# Altium PCB Flashlight.PcbDoc
Units mil, origin at the board's own origin, x right, y up, seen from the top; angles counter-clockwise.
Board outline 2862.27 x 1332.27 mil, 2 copper layers (Top Layer, Bottom Layer); 11 components, 6 nets, 31 pads, 7 vias.
Unrouted connection lines stored in the file: 1.
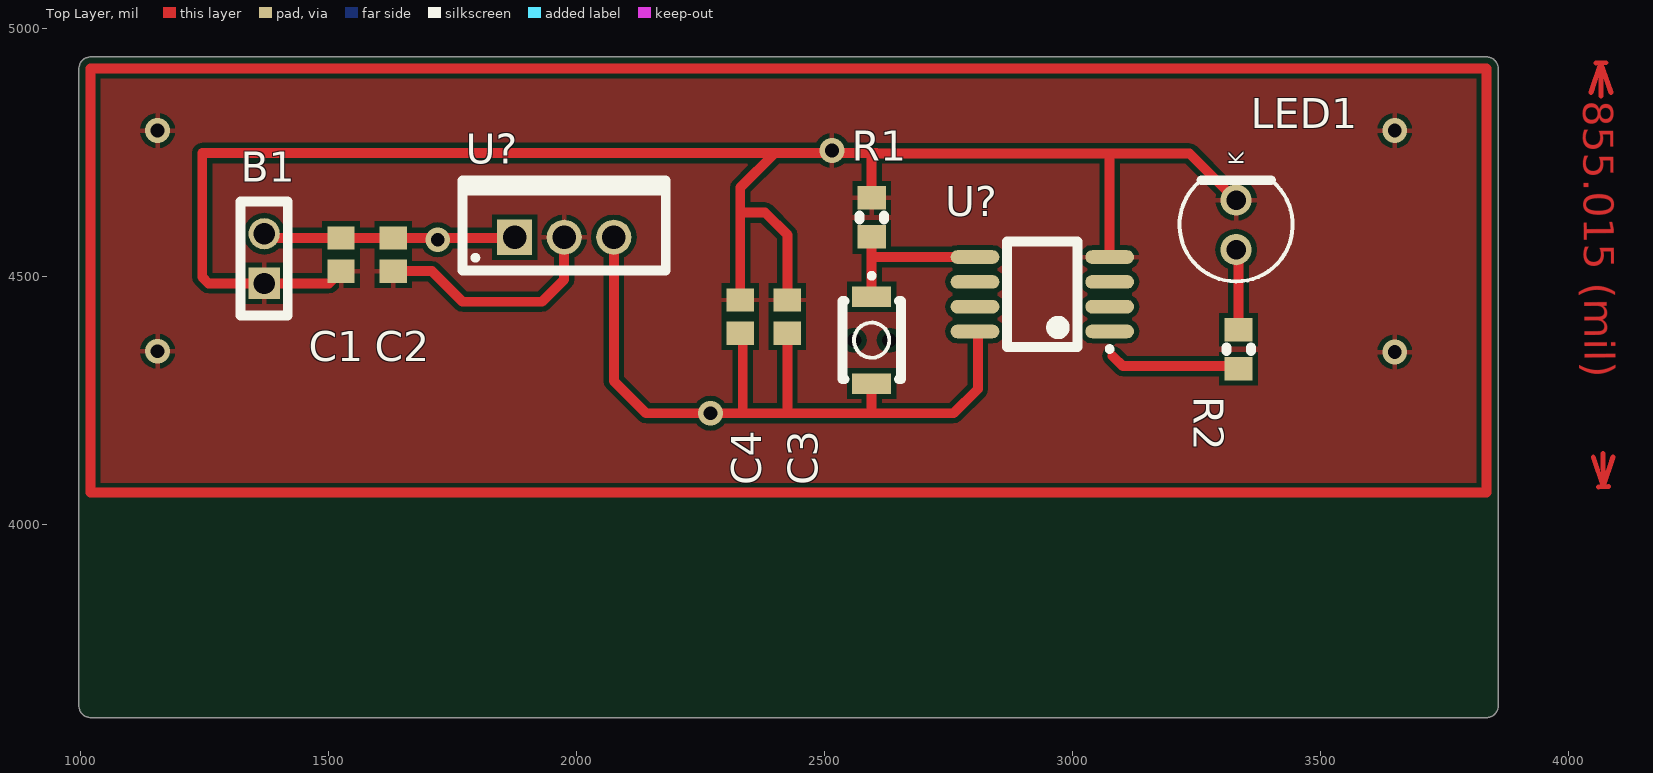
[diagram p0: Top Layer view]
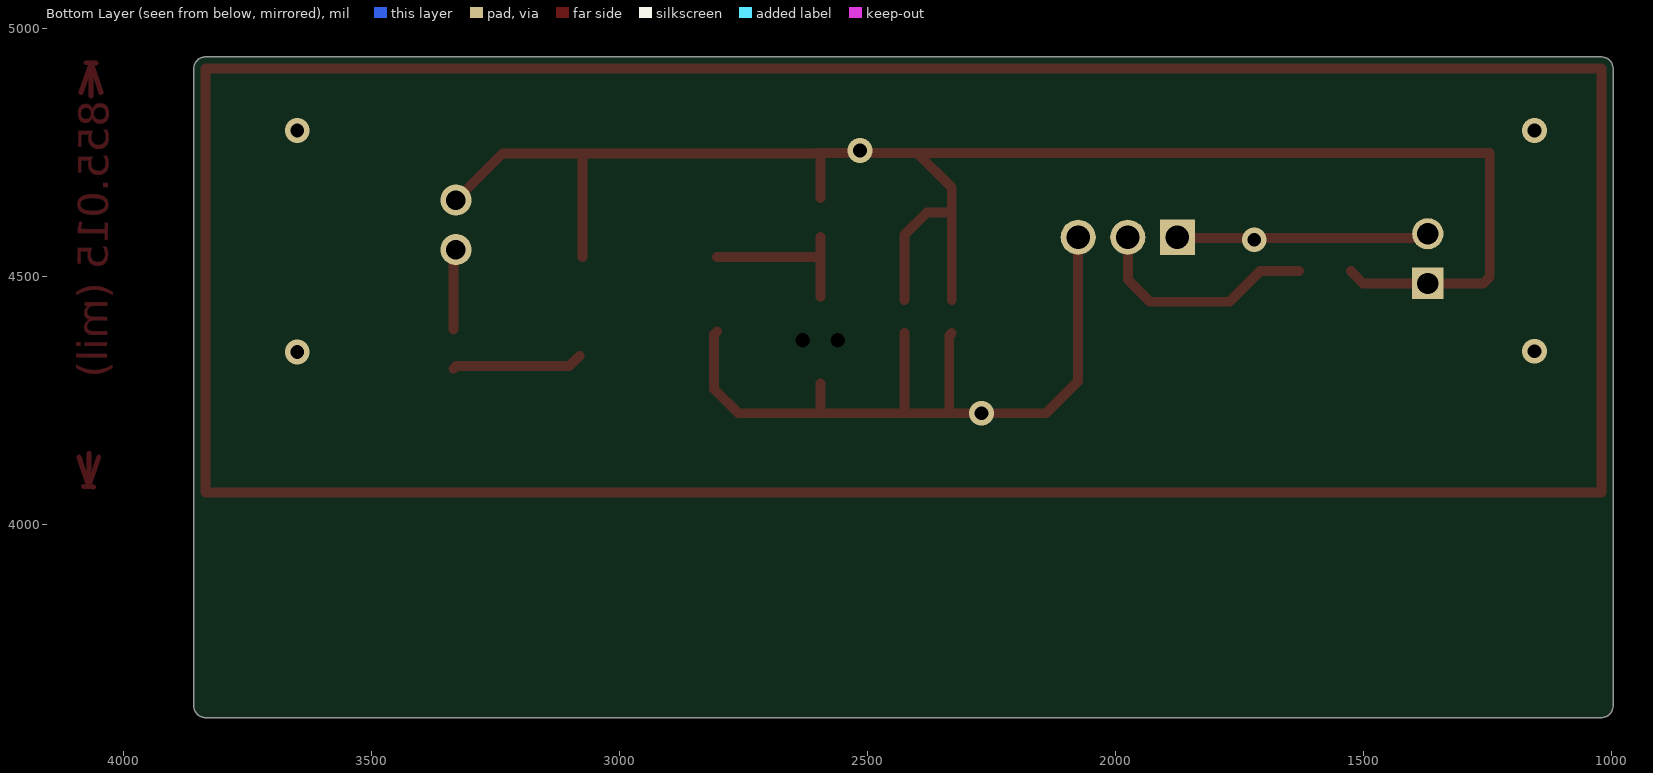
[diagram p1: Bottom Layer view, seen from below]

## Layer stack, top to bottom
Top Solder: solder mask 0.4, Solder Resist, Dk 3.5
Top Layer: signal copper 1.4
Dielectric 1: dielectric 12.6, FR-4, Dk 4.8
Bottom Layer: signal copper 1.4
Bottom Solder: solder mask 0.4, Solder Resist, Dk 3.5

## Board outline
1020,3611.36 cw(c1020,3635) 996.36,3635 996.36,4920 cw(c1020,4920) 1020,4943.64 3835,4943.64 cw(c3835,4920) 3858.64,4920 3858.64,3635 cw(c3835,3635) 3835,3611.36

## Design rules (kind name [scope] priority, off if disabled: settings)
Clearance [All] p1: gap=10 ignorepadtopadclearanceinfootprint=FALSE except(0: Arc-Hole Track-Hole SMDPad-Hole THPad-Hole Via-Hole Fill-Hole Poly-Hole Region-Hole Text-Hole)
PolygonConnect [All] p1: connectstyle=Relief reliefconductorwidth=10 reliefentries=4 polygonreliefangle="90 Angle" airgapwidth=10
RoutingVias [All] p1: holewidth=28 width=50 viastyle="Through Hole" minholewidth=28 minwidth=50 maxholewidth=28 maxwidth=50
SolderMaskExpansion [All] p1: expansion=4
Width [All] p1: maxlimit=30 minlimit=10 preferedwidth=20 minimp=50.000000 maximp=50.000000 favimp=50.000000
30 further rules are at their usual default settings.

## Classes and differential pairs
component class FlashLight_Circuit: B1 C1 C2 C3 C4 LED1 R1 R2 U? ""

## Components (designator, comment, footprint, x,y, rotation, side; value= is the part's Value field where it differs from the comment)
B1 "Battery Connector" SMTC-PHF-102-01-X-S-002 1370,4487.05 r90 top
C1 "0.1 uF" CAPC2013X135X45NL10T25 1525,4545 r90 top
C2 "10uF" CAPC2013X135X45NL10T25 1630,4545 r90 top
C3 "0.1uF" CAPC2013X135X45NL10T25 2425,4420 r270 top
C4 "10uF" CAPC2013X135X45NL10T25 2330,4420 r270 top
LED1 "151053YS04500" "Type 5mm" 3330,4605 r90 top
R1 "10K Ohm" RESC2013X60X35ML10T20 2595,4620 r270 top
R2 "300 Ohm" RESC2013X60X35ML10T20 3335,4354.17 r90 top
U? "L7805ABP" TO220FP 1975,4580 r0 top
U? "ATtiny85-20SU" 8S2_M 2939.17,4465 r180 top
? "TVAF06" JNFU-TVAF06_V 2595,4372.4 r270 top

## Footprints (in the part's own frame and the unit in brackets; to place one, negate y for a bottom-side part, rotate by r counter-clockwise, add the part's x,y. Pads: shape width x height; smd on the part's side, far side on the other; paste and mask are expansions set on the pad)
8S2_M [mm] "SOP, 8-Leads, Body 5.3x5.3mm, Pitch 1.27mm, IPC Low Density"
  oval 2.5x0.7 smd: 1(-3.45,1.905) 2(-3.45,0.635) 3(-3.45,-0.635) 4(-3.45,-1.905) 5(3.45,-1.905) 6(3.45,-0.635) 7(3.45,0.635) 8(3.45,1.905)
  silkscreen extent -3.57,-2.7 1.8,2.93, body extent -2.7,-2.68 2.7,2.68, height 2.16
CAPC2013X135X45NL10T25 [mm] "Chip Capacitor, 2-Leads, Body 2.00x1.25mm, IPC Medium Density"
  rect 1.2x1.4 smd: 1(-0.85,0) 2(0.85,0)
  body extent -1.05,-0.67 1.05,0.67, height 1.35
JNFU-TVAF06_V [mm] "Switch, Push Button, SMD, 2-Leads, Body 3x4mm"
  rect 1.05x2 smd: 1(-2.225,0) 2(2.225,0)
  round 0.4 hole 0.75 unplated: MH1(0,0.9) MH2(0,-0.9)
  silkscreen extent -3.42,-1.5 2,1.5, body extent -2,-1.5 2,1.5, height 2
RESC2013X60X35ML10T20 [mm] "Chip Resistor, 2-Leads, Body 2.00x1.25mm, IPC Low Density"
  rect 1.2x1.45 smd: 1(-1,0) 2(1,0)
  silkscreen extent -0.1,-0.63 0.1,0.63, body extent -1.05,-0.67 1.05,0.67, height 0.6
SMTC-PHF-102-01-X-S-002 [mm] "Press Fit Socket Assembly, 1x2 Pins, Vertical, 2.54mm Pitch, Female"
  rect 1.6x1.6 hole 1.081: 1(0,0)
  round 1.6 hole 1.081: 2(2.54,0)
  silkscreen extent -1.65,-1.2 4.19,1.2, body extent -1.52,-1.21 4.06,1.21, height 8.51
TO220FP [mm] "TO, Thru-Hole, Vertical, Heatsink Mounted; 3 In-Line Leads; Pitch 2.54 mm"
  rect 1.8x1.8 hole 1.2: 1(-2.54,0)
  round 1.8 hole 1.2: 2(0,0) 3(2.54,0)
  silkscreen extent -5.2,-1.7 5.2,2.9, body extent -5.25,-1.75 5.25,2.95, height 20
"Type 5mm" [mm] "THT, LED-5mm, 2pin- Body 5.8mm"
  round 1.6 hole 1: 1(1.27,0) 2(-1.27,0)
  silkscreen extent -2.9,-2.9 2.29,2.9, body extent -2.9,-2.9 2.5,2.9, height 11.7

## Part data
B1: library part CMP-1023-00103-1, "Press Fit Socket, Through-hole, Vertical, -55 to 125 degC, 2.54 mm Pitch, 2-Pin, Female, RoHS", Manufacturer=Samtec, PartNumber=PHF-102-01-L-S-002, Temperature Range="-55 to 125 degC", ComponentLink1Description="Manufacturer URL", ComponentLink1URL=http://www.samtec.com, ComponentLink2Description=Datasheet, ComponentLink2URL=http://www.samtec.com/documents/webfiles/pdf/phf.pdf, ComponentLink3Description="Package Specification", ComponentLink3URL=http://www.samtec.com/documents/webfiles/cpdf/PHF-1XX-XX-X-X-XXX-MKT.pdf, DatasheetVersion=F-214, Mounting Technology=Through-hole, Orientation=Vertical, PackageDescription=".100 Press Fit Socket Assembly", PackageReference=PHF-102-01-X-S-002, PackageVersion="F, 9/2009", Pitch="2.54 mm", RoHS=True
C1 C2 C3 C4: library part CMP-2007-03551-1, Manufacturer=Murata, Part Number=GRM21BR71A105KA01L
LED1: library part CMP-1477-00001-1, "THT LED round mono-color waterclear, WL-TMRW, Yellow", Emitting color=Yellow, Manufacturer="Wuerth Elektronik", ComponentLink1Description="Manufacturer URL", ComponentLink1URL=http://www.we-online.com, ComponentLink2Description=Datasheet, ComponentLink2URL=http://katalog.we-online.de/pbs/datasheet/7448042001.pdfhttp://katalog.we-online.de/pbs/datasheet/7448042001.pdfhttp://katalog.we-online.de/pbs/datasheet/7448042001.pdfhttp://katalog.we-online.de/pbs/datasheet/151053YS04500.pdf, PackageReference="Type 5mm", PartNumber=151053YS04500
R1 R2: library part CMP-2001-01354-1, Manufacturer=Yageo, Part Number=RC0805JR-07200RL
U?: library part CMP-0244-00479-1, "Positive Voltage Regulator, 5V, 3-Pin TO-220FP", ComponentLink1Description="Manufacturer URL", ComponentLink1URL=http://www.st.com, ComponentLink2Description=Datasheet, ComponentLink2URL=http://www.st.com/internet/com/TECHNICAL_RESOURCES/TECHNICAL_LITERATURE/DATASHEET/CD00000444.pdf, DatasheetVersion=16/11/2011, PackageDescription="TO, Thru-Hole, Vertical, Heatsink Mounted; 3 In-Line Leads; Pitch 2.54 mm", PackageReference=TO220FP, PackageVersion=2011
U?: library part CMP-0093-00173-2, "8-bit AVR Microcontroller, 20MHz, 2.7-5.5V, 8K Flash, 512 Bytes EEPROM, 512 Bytes SRAM, Industrial Grade (-40°C to 85°C), 8-Lead SOIC, Pb-Free", ComponentLink1Description="Manufacturer URL", ComponentLink1URL=http://www.atmel.com/, ComponentLink2Description="ATtiny25/45/85 Datasheet", ComponentLink2URL=http://www.atmel.com/dyn/resources/prod_documents/doc2586.pdf, ComponentLink3Description="ATtiny25/45/85 Summary", ComponentLink3URL=http://www.atmel.com/dyn/resources/prod_documents/2586S.pdf, DatasheetVersion="revN, Apr-2011", PackageReference=8S2, PackageVersion="revF, Apr-2008", RevisionNote="DatasheetVersion updated. URLs added."
?: library part CMP-0587-00001-1, "Switch, SPST Push Button, 50 mA, 12 V DC, SMD, -30 to 85 degC, RoHS", Contact Resistance="100 mW max", Dielectric Strength="250 V AC for 1 min", Insulation Resistance="100 MW min. 100 V DC", Manufacturer=Jianfu, Operating Temperature="-30 to 85 degC", Rating="50 mA. 12 V DC", ComponentLink1Description="Manufacturer URL", ComponentLink1URL=http://www.jian-fu.com/, ComponentLink2Description=Datasheet, ComponentLink2URL=http://en.jian-fu.com/product-22.html, Lifetime="100000 Cycles min", Mounting Technology="Surface Mount", PackageDescription="2-Pin Switch, Push Button, SMD, Body 2.9 x 3.9 mm", PackageReference=TVAF06, PartNumber=TVAF06, RoHS=TRUE, Travel="0.13 +/- 0.05 mm"

## Via types
v1: diameter 50, hole 28, Top Layer to Bottom Layer, 7 vias

## Nets (pads, with @x,y where several pads share a name; then routed paths per layer and width w, separated by ;. In a path a pad name is that pad's centre, name@x,y a point inside that pad or via, vN(x,y) a via of type N, cw(c..) or ccw(c..) an arc to the next point about the centre after c; other vN are vias at no path point)
+5: ?.2 C3.2 C4.2 U?.3@2075,4580 U?.8 | length 1576.7
  Top Layer w20: U?.3@2075,4580 2075,4290 2140,4225 v1(2270,4225) 2340,4225 ; C4.2 2335,4381.54 2335,4230 2340,4225 ; C3.2 2425,4225 ; ?.2 2595,4225 ; U?.8 2809.17,4384.17 2809.17,4274.17 2760,4225 2595,4225 ; 2340,4225 2425,4225 ; 2425,4225 2595,4225
+9V: B1.2 C1.2 C2.2 U?.1@1875,4580 | length 509.2
  Top Layer w20: B1.2 1378.58,4578.46 C1.2 C2.2 1873.46,4578.46 U?.1@1875,4580
  other v1: 1720,4575
GND: B1.1 C1.1 C2.1 C3.1 C4.1 LED1.1 R1.1 U?.2@1975,4580 U?.4 | length 4016.9
  Top Layer w20: C1.1 1500.51,4487.05 B1.1 1257.95,4487.05 1245,4500 1245,4750 2400,4750 ; C2.1 1708.46,4511.54 1770,4450 1930,4450 1975,4495 U?.2@1975,4580 ; C4.1 2330,4630 ; C3.1 2425,4585 2380,4630 2330,4630 ; R1.1 2595,4750 ; U?.4 3075,4743.35 3080.83,4749.17 ; LED1.1 3235.83,4749.17 3080.83,4749.17 ; 2330,4630 2330,4680 2400,4750 ; 2400,4750 2595,4750 ; 2595,4750 2605,4750 2605.83,4749.17 3080.83,4749.17
  other v1: 3650,4348.43 1155,4350 2515,4755 1155,4795 3650,4795
Net_1: ?.1 R1.2 U?.5 | length 329
  Top Layer w20: ?.1 2595,4540 ; R1.2 2595,4540 ; U?.5 2595,4540
NetLED1_2: LED1.2 R2.2 | length 163.5
  Top Layer w20: LED1.2 3335,4550 R2.2
NetR2_1: R2.1 U?.1@3075,4390 | length 265
  Top Layer w20: 3080.83,4340.83 3101.65,4320 3329.8,4320 R2.1
pads on no net: ?.MH1 ?.MH2 U?.2@3075,4440 U?.3@3075,4490 U?.6 U?.7
copper on no net: | length 7766.2
  Top Layer w10: 4045.89,4871.71 4065.54,4931.83 ; 4050.19,4136.71 4070.54,4076.83 ; 4055.54,4931.77 4075.54,4931.89 ; 4060.54,4076.77 4080.54,4076.89 ; 4065.93,4865.21 4065.54,4931.83 ; 4070.15,4143.45 4070.54,4076.83 ; 4085.89,4871.95 4065.54,4931.83 ; 4090.19,4136.94 4070.54,4076.83
  Top Layer w20: 1020,4065 3835,4065 3835,4920 1020,4920 1020,4065

## Polygon pours and split planes (outlines as drawn)
GND on Top Layer (solid, pour order 14): 1012.8,4918.84 1012.8,4065 3827.8,4065 3827.8,4923.84
no net on Top Layer (solid, pour order 12): 2415,4915

## Other copper
Top Layer:
  text "855.015 (mil)" at 4030,4855 h60 r270.34

## Dimensions
1020,4065 to 3835,4065 on Top Layer

## Text inside footprints (layer, text, board x,y; h text height)
LED1: Top Overlay "K" at 3345,4725 h30 r90; Mechanical 15 "K" at 3345,4725 h30 r90